# Altium PCB Sampler_DIOT.PCBDOC (part 7 of 10)
Units mm, origin at the board's own origin, x right, y up, seen from the top; angles counter-clockwise.
Board outline 222.9 x 100 mm, 4 copper layers (L1, P2, L3, L4), stack 1.6 mm thick; 697 components, 418 nets, 2175 pads, 1124 vias.
Unrouted connection lines stored in the file: 6.
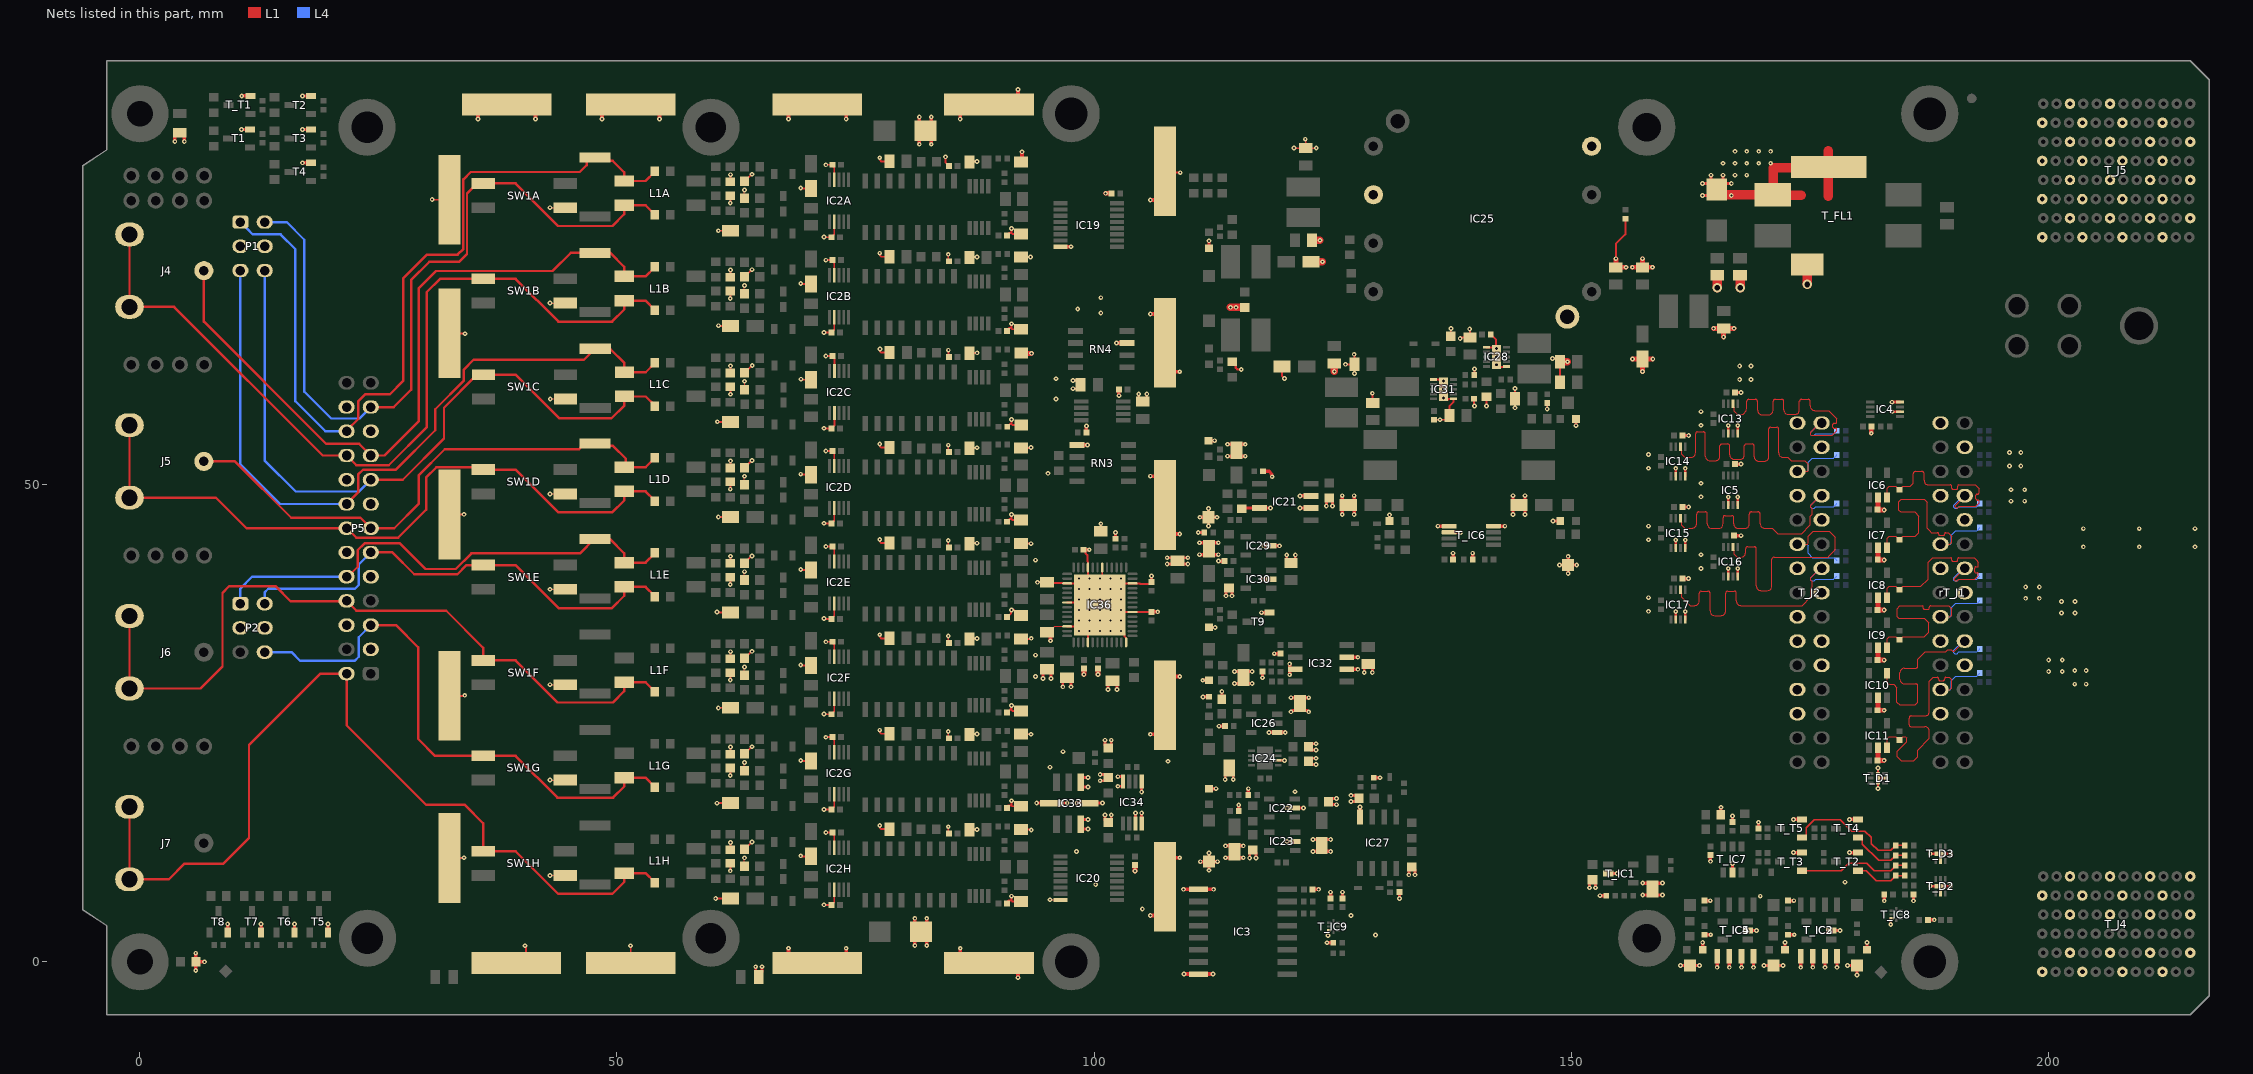
[diagram p7: the nets of this part, all layers, seen from the top]

## Via types
v1: diameter 0.5, hole 0.2, L1 to L4, tented both sides, 1103 vias
v2: diameter 1, hole 0.6, L1 to L4, tented both sides, 15 vias
v3: diameter 0.6, hole 0.3, L1 to L4, tented both sides, 6 vias

## Nets (pads, with @x,y where several pads share a name; then routed paths per layer and width w, separated by ;. In a path a pad name is that pad's centre, name@x,y a point inside that pad or via, vN(x,y) a via of type N, cw(c..) or ccw(c..) an arc to the next point about the centre after c; other vN are vias at no path point) (continued)
EEM_IO.LVDS_P2: IC6.3 R15.2 rT_J1.8 T_R37.2 | length 25.3
  L1 w0.127: IC6.3@183.127,48.67 183.127,49.637 183.333,49.844 184.062,49.844 184.407,49.5 R15.2@184.427,49.5 184.447,49.5 184.791,49.844 185.207,49.844 185.398,49.844 ccw(c185.398,50.323) 185.877,50.323 185.877,51.178 cw(c186.102,51.178) 186.102,51.403 186.779,51.403 cw(c186.779,51.178) 187.004,51.178 187.004,50.468 ccw(c187.483,50.468) 187.483,49.989 188.085,49.989 189.084,49.989 189.774,49.989 cw(c189.774,49.862) 189.901,49.862 189.901,49.653 ccw(c190.027,49.653) 190.027,49.528 190.403,49.528 ccw(c190.403,49.653) 190.528,49.653 190.528,49.862 cw(c190.655,49.862) 190.655,49.989 191.2,49.989 192.381,49.989 192.583,49.788 192.771,49.6 192.771,49.161 cw(c192.644,49.161) 192.644,49.034 192.573,49.034 ccw(c192.573,48.909) 192.447,48.909 192.447,48.533 ccw(c192.573,48.533) 192.573,48.407 192.644,48.407 cw(c192.644,48.28) 192.771,48.28 192.771,48.097 192.669,47.995 192.425,47.751 190.729,47.751 190.557,47.579 190.387,47.579 190.273,47.693 190.273,47.798 rT_J1.8@191.365,48.89
  L4 w0.127: rT_J1.8@191.27,48.86 191.12,48.86 190.142,47.882 190.142,47.627 190.217,47.553 190.495,47.553 190.666,47.724 192.532,47.724 192.61,47.802 192.63,47.802 192.856,48.028 T_R37.2@192.856,48.048
EEM_IO.LVDS_P3: IC7.3 R16.2 rT_J1.11 T_R38.2 | length 26.2
  L1 w0.127: IC7.3@183.127,43.42 183.127,44.387 183.333,44.594 184.062,44.594 184.407,44.25 R16.2@184.427,44.25 184.447,44.25 184.791,44.594 186.059,44.594 186.454,44.989 186.454,46.705 186.009,47.15 184.55,47.15 184.375,47.325 184.375,48.225 184.625,48.475 187.05,48.475 187.335,48.19 187.335,45.438 187.589,45.184 187.78,44.993 188.406,44.993 cw(c188.406,44.866) 188.533,44.866 188.533,44.818 ccw(c188.659,44.818) 188.659,44.693 189.035,44.693 ccw(c189.035,44.818) 189.16,44.818 189.16,44.866 cw(c189.287,44.866) 189.287,44.993 189.528,44.993 189.581,44.94 189.898,44.622 189.898,43.966 189.713,43.78 rT_J1.11@188.73,43.78
  L4 w0.127: rT_J1.11@188.73,43.78 189.728,43.78 189.848,43.9 189.848,44.727 190.305,45.184 192.532,45.184 192.609,45.262 192.629,45.262 192.856,45.488 T_R38.2@192.856,45.508
EEM_IO.LVDS_P4: IC8.3 R17.2 rT_J1.14 T_R39.2 | length 25.1
  L1 w0.127: IC8.3@183.127,38.17 183.127,39.137 183.333,39.344 184.062,39.344 184.407,39 R17.2@184.427,39 184.447,39 184.791,39.344 186.649,39.344 187.427,40.122 187.427,41.872 187.91,42.355 189.093,42.355 189.784,42.355 cw(c189.784,42.228) 189.911,42.228 189.911,42.115 ccw(c190.036,42.115) 190.036,41.99 190.412,41.99 ccw(c190.412,42.115) 190.538,42.115 190.538,42.228 cw(c190.665,42.228) 190.665,42.355 190.941,42.355 192.254,42.355 192.461,42.148 192.708,41.901 192.708,41.521 cw(c192.581,41.521) 192.581,41.394 192.436,41.394 ccw(c192.436,41.269) 192.311,41.269 192.311,40.893 ccw(c192.436,40.893) 192.436,40.767 192.581,40.767 cw(c192.581,40.64) 192.708,40.64 192.708,40.487 192.564,40.344 192.321,40.101 190.634,40.101 190.462,39.929 190.292,39.929 190.178,40.043 190.178,40.148 rT_J1.14@191.27,41.24
  L4 w0.127: rT_J1.14@191.27,41.24 191.12,41.24 190.142,40.262 190.142,40.007 190.217,39.933 190.495,39.933 190.666,40.104 192.532,40.104 192.61,40.182 192.63,40.182 192.856,40.408 T_R39.2@192.856,40.428
EEM_IO.LVDS_P5: IC9.3 R18.2 rT_J1.17 T_R40.2 | length 25
  L1 w0.127: IC9.3@183.127,32.92 183.127,33.887 183.333,34.094 184.062,34.094 184.407,33.75 184.447,33.75 184.791,34.094 187.021,34.094 187.479,34.552 187.479,35.564 187.043,36 184.336,36 184.174,36.162 184.174,37.029 184.447,37.301 186.115,37.301 186.805,37.301 cw(c186.805,37.174) 186.932,37.174 186.932,37.067 ccw(c187.058,37.067) 187.058,36.942 187.434,36.942 ccw(c187.434,37.067) 187.559,37.067 187.559,37.174 cw(c187.686,37.174) 187.686,37.301 188.178,37.301 189.599,37.301 189.898,37.002 189.898,36.346 189.713,36.16 rT_J1.17@188.73,36.16
  L4 w0.127: rT_J1.17@188.73,36.16 189.728,36.16 189.848,36.28 189.848,37.107 190.305,37.564 192.532,37.564 192.609,37.642 192.629,37.642 192.856,37.868 T_R40.2@192.856,37.888
EEM_IO.LVDS_P6: IC10.4 rT_J1.20 T_R41.2 | length 24.4
  L1 w0.127: IC10.4@183.127,30.27 183.127,29.322 183.379,29.07 183.805,29.07 184.154,28.721 184.154,27.225 184.445,26.934 186.06,26.934 186.351,27.225 186.351,28.725 186.351,28.916 ccw(c186.125,28.916) 186.125,29.141 184.952,29.141 cw(c184.952,29.62) 184.473,29.62 184.473,30.297 cw(c184.952,30.297) 184.952,30.776 186.125,30.776 ccw(c186.125,31.001) 186.351,31.001 186.351,31.591 186.351,31.711 187.149,32.51 189.282,32.51 189.463,32.691 189.872,32.691 190.022,32.541 190.191,32.541 rT_J1.20@191.27,33.62
  L4 w0.127: rT_J1.20@191.27,33.62 191.12,33.62 190.142,32.642 190.142,32.387 190.217,32.313 190.495,32.313 190.666,32.484 192.532,32.484 192.61,32.562 192.63,32.562 192.856,32.788 T_R41.2@192.856,32.808
EEM_IO.LVDS_P7: IC11.3 R19.2 rT_J1.23 T_R42.2 | length 30.9
  L1 w0.127: IC11.3@183.127,22.42 183.127,23.387 183.333,23.594 184.062,23.594 184.407,23.25 R19.2@184.427,23.25 184.447,23.25 184.79,23.593 185.038,23.593 185.17,23.461 ; 185.17,23.461 185.17,23.063 184.196,22.089 184.196,21.478 184.603,21.071 185.926,21.071 186.35,21.495 186.35,22.196 187.564,23.411 187.564,23.973 187.564,24.163 ccw(c187.085,24.163) 187.085,24.643 185.661,24.643 cw(c185.661,24.868) 185.435,24.868 185.435,25.544 cw(c185.661,25.544) 185.661,25.77 187.085,25.77 ccw(c187.085,26.249) 187.564,26.249 187.564,26.8 187.564,29.395 187.779,29.61 187.983,29.814 188.405,29.814 cw(c188.405,29.687) 188.532,29.687 188.532,29.606 ccw(c188.658,29.606) 188.658,29.481 189.034,29.481 ccw(c189.034,29.606) 189.159,29.606 189.159,29.687 cw(c189.286,29.687) 189.286,29.814 189.635,29.814 189.89,29.558 189.898,29.55 189.898,28.726 189.713,28.54 rT_J1.23@188.73,28.54
  L4 w0.127: rT_J1.23@188.73,28.54 189.728,28.54 189.848,28.66 189.848,29.487 190.305,29.944 192.532,29.944 192.609,30.022 192.629,30.022 192.856,30.248 T_R42.2@192.856,30.268
EEM_IO.LVDS_P8: IC13.6 T_J2.2 T_R43.2 | length 30.7
  L1 w0.127: IC13.6@166.978,58.494 166.978,58.219 167.101,58.096 167.101,57.724 167.442,57.383 167.929,57.383 168.035,57.383 168.209,57.557 ccw(c167.694,58.073) 168.423,58.073 168.423,58.735 cw(c168.648,58.735) 168.648,58.961 169.324,58.961 cw(c169.324,58.735) 169.55,58.735 169.55,57.821 ccw(c170.029,57.821) 170.029,57.341 170.705,57.341 ccw(c170.705,57.821) 171.185,57.821 171.185,58.735 cw(c171.41,58.735) 171.41,58.961 172.086,58.961 cw(c172.086,58.735) 172.312,58.735 172.312,57.85 ccw(c172.791,57.85) 172.791,57.37 173.467,57.37 ccw(c173.467,57.85) 173.947,57.85 173.947,58.735 cw(c174.172,58.735) 174.172,58.961 174.848,58.961 cw(c174.848,58.735) 175.074,58.735 175.074,58.264 ccw(c175.553,58.264) 175.553,57.785 176.152,57.785 176.997,57.785 177.694,57.088 177.856,56.926 177.856,56.572 cw(c177.729,56.572) 177.729,56.445 177.566,56.445 ccw(c177.566,56.339) 177.461,56.339 177.461,56.023 ccw(c177.566,56.023) 177.566,55.918 177.729,55.918 cw(c177.729,55.791) 177.856,55.791 177.856,55.669 177.416,55.229 177.359,55.173 175.217,55.173 175.142,55.247 175.142,55.502 176.12,56.48 T_J2.2@176.27,56.48
  L4 w0.127: T_J2.2@176.27,56.48 176.12,56.48 175.142,55.502 175.142,55.247 175.217,55.173 175.494,55.173 175.666,55.344 177.532,55.344 177.609,55.422 177.629,55.422 177.856,55.648 T_R43.2@177.856,55.668
EEM_IO.LVDS_P9: IC14.6 T_J2.5 T_R44.2 | length 38.6
  L1 w0.127: IC14.6@161.478,53.994 161.478,53.719 161.601,53.596 161.601,53.224 161.942,52.883 162.401,52.883 162.591,52.883 ccw(c162.591,53.342) 163.051,53.342 163.051,55.34 cw(c163.256,55.34) 163.256,55.546 163.872,55.546 cw(c163.872,55.34) 164.078,55.34 164.078,52.994 ccw(c164.537,52.994) 164.537,52.535 165.153,52.535 ccw(c165.153,52.994) 165.613,52.994 165.613,54.074 cw(c165.818,54.074) 165.818,54.279 166.434,54.279 cw(c166.434,54.074) 166.64,54.074 166.64,53.129 ccw(c167.099,53.129) 167.099,52.67 167.715,52.67 ccw(c167.715,53.129) 168.175,53.129 168.175,54.074 cw(c168.38,54.074) 168.38,54.279 168.996,54.279 cw(c168.996,54.074) 169.202,54.074 169.202,52.943 ccw(c169.661,52.943) 169.661,52.483 170.277,52.483 ccw(c170.277,52.943) 170.737,52.943 170.737,55.85 cw(c170.942,55.85) 170.942,56.056 171.558,56.056 cw(c171.558,55.85) 171.764,55.85 171.764,53.342 ccw(c172.223,53.342) 172.223,52.883 172.718,52.883 173.085,52.515 173.548,52.515 174.522,52.515 174.873,52.165 174.873,51.474 174.798,51.4 T_J2.5@173.73,51.4
  L4 w0.127: T_J2.5@173.73,51.4 174.728,51.4 174.847,51.519 174.847,52.347 175.304,52.804 177.532,52.804 177.609,52.882 177.629,52.882 177.856,53.108 T_R44.2@177.856,53.128
EEM_IO.LVDS_P10: IC15.6 T_J2.8 T_R45.2 | length 31.3
  L1 w0.127: IC15.6@161.477,46.494 161.477,46.219 161.6,46.096 161.6,45.767 161.911,45.457 162.5,45.457 162.691,45.457 ccw(c162.691,45.936) 163.17,45.936 163.17,46.938 cw(c163.395,46.938) 163.395,47.164 164.072,47.164 cw(c164.072,46.938) 164.297,46.938 164.297,45.901 ccw(c164.776,45.901) 164.776,45.422 165.453,45.422 ccw(c165.453,45.901) 165.932,45.901 165.932,46.554 cw(c166.157,46.554) 166.157,46.78 166.834,46.78 cw(c166.834,46.554) 167.059,46.554 167.059,45.901 ccw(c167.538,45.901) 167.538,45.422 168.215,45.422 ccw(c168.215,45.901) 168.694,45.901 168.694,46.938 cw(c168.919,46.938) 168.919,47.164 169.596,47.164 cw(c169.596,46.938) 169.821,46.938 169.821,45.936 ccw(c170.3,45.936) 170.3,45.457 171.02,45.457 171.076,45.457 171.644,44.889 174.171,44.889 175.099,45.817 175.099,46.73 175.291,46.922 175.291,47.478 175.142,47.627 175.142,47.882 176.12,48.86 T_J2.8@176.27,48.86
  L4 w0.127: T_J2.8@176.27,48.86 176.12,48.86 175.142,47.882 175.142,47.627 175.217,47.553 175.494,47.553 175.666,47.724 177.532,47.724 177.609,47.802 177.629,47.802 177.856,48.028 T_R45.2@177.856,48.048
EEM_IO.LVDS_P11: IC16.6 T_J2.11 T_R46.2 | length 32.1
  L1 w0.127: IC16.6@166.978,43.495 166.978,43.22 167.101,43.097 167.101,42.724 167.412,42.414 167.624,42.414 167.815,42.414 ccw(c167.815,42.893) 168.294,42.893 168.294,43.289 cw(c168.519,43.289) 168.519,43.514 169.196,43.514 cw(c169.196,43.289) 169.421,43.289 169.421,39.397 ccw(c169.9,39.397) 169.9,38.918 170.577,38.918 ccw(c170.577,39.397) 171.056,39.397 171.056,42.188 cw(c171.281,42.188) 171.281,42.414 171.897,42.414 176.959,42.414 177.034,42.488 177.713,43.167 177.713,44.482 177.055,45.14 175.38,45.14 174.873,44.633 174.873,43.854 174.798,43.78 T_J2.11@173.73,43.78
  L4 w0.127: T_J2.11@173.73,43.78 174.728,43.78 174.847,43.66 174.847,42.832 175.304,42.375 177.532,42.375 177.609,42.298 177.629,42.298 T_R46.2@177.856,42.071 T_R46.2@177.856,42.051
EEM_IO.LVDS_P12: IC17.6 T_J2.14 T_R47.2 | length 30.5
  L1 w0.127: IC17.6@161.477,38.995 161.477,38.72 161.6,38.597 161.6,38.224 162.481,37.343 162.777,37.343 162.968,37.343 ccw(c162.968,37.823) 163.447,37.823 163.447,38.64 cw(c163.673,38.64) 163.673,38.866 164.349,38.866 cw(c164.349,38.64) 164.574,38.64 164.574,36.775 ccw(c165.054,36.775) 165.054,36.295 165.73,36.295 ccw(c165.73,36.775) 166.209,36.775 166.209,38.64 cw(c166.435,38.64) 166.435,38.866 167.111,38.866 cw(c167.111,38.64) 167.336,38.64 167.336,37.823 ccw(c167.816,37.823) 167.816,37.343 168.432,37.343 174.229,37.343 175.133,38.247 175.133,39.134 175.291,39.292 175.291,39.858 175.142,40.007 175.142,40.262 176.12,41.24 T_J2.14@176.27,41.24
  L4 w0.127: T_J2.14@176.27,41.24 176.12,41.24 175.142,40.262 175.142,40.007 175.217,39.933 175.494,39.933 175.666,40.104 177.532,40.104 177.609,40.182 177.629,40.182 177.856,40.408 T_R47.2@177.856,40.428
EEM_IO.LVDS_P13: T_J2.17
EEM_IO.LVDS_P14: T_J2.20
EEM_IO.LVDS_P15: T_J2.23
GA0: T_R13.1 T_R31.1 T_T2.1 | length 5.6
  L1 w0.152: T_T2.1@180.1,9.55 180.958,9.55 181.993,8.515 183.523,8.515 184.032,9.024 T_R31.1@184.032,9.034 184.032,9.044 T_R13.1@185.002,9.044
GA1: T_R14.1 T_R32.1 T_T3.1 | length 11.7
  L1 w0.152: T_T3.1@174.216,9.55 178.3,9.55 179.1,10.35 181.004,10.35 181.785,9.569 182.714,9.569 182.718,9.565 183.467,9.565 183.471,9.569 183.523,9.569 T_R32.1@184.032,10.078 184.032,10.098 T_R14.1@185.002,10.098
GA2: T_R16.1 T_R33.1 T_T4.1 | length 6.4
  L1 w0.152: T_T4.1@180.1,13.017 180.291,13.017 180.529,12.778 180.529,12.342 182.247,10.623 183.523,10.623 184.032,11.133 T_R33.1@184.032,11.153 T_R16.1@185.002,11.153
GA3: T_R18.1 T_R34.1 T_T5.1 | length 14
  L1 w0.152: T_T5.1@174.216,13.027 174.401,13.027 174.65,13.276 174.65,13.462 174.665,13.477 174.665,14.065 175.5,14.9 178.225,14.9 179.425,13.7 180.815,13.7 181.481,13.034 181.481,12.375 182.179,11.678 183.523,11.678 184.032,12.187 T_R34.1@184.032,12.207 T_R18.1@185.002,12.207
GND: C1A.1 C1B.1 C1C.1 C1D.1 C1E.1 C1F.1 C1G.1 C1H.1 C3A.1 C3B.1 C3C.1 C3D.1 C3E.1 C3F.1 C3G.1 C3H.1 C4A.1 C4B.1 C4C.1 C4D.1 C4E.1 C4F.1 C4G.1 C4H.1 C5A.1 C5B.1 C5C.1 C5D.1 C5E.1 C5F.1 C5G.1 C5H.1 C7A.2 C7B.2 C7C.2 C7D.2 C7E.2 C7F.2 C7G.2 C7H.2 C8A.2 C8B.2 C8C.2 C8D.2 C8E.2 C8F.2 C8G.2 C8H.2 C9A.1 C9B.1 C9C.1 C9D.1 C9E.1 C9F.1 C9G.1 C9H.1 C10A.1 C10B.1 C10C.1 C10D.1 C10E.1 C10F.1 C10G.1 C10H.1 C11A.1 C11B.1 C11C.1 C11D.1 C11E.1 C11F.1 C11G.1 C11H.1 C12A.1 C12B.1 C12C.1 C12D.1 C12E.1 C12F.1 C12G.1 C12H.1 C13A.1 C13B.1 C13C.1 C13D.1 C13E.1 C13F.1 C13G.1 C13H.1 C14A.1 C14B.1 C14C.1 C14D.1 C14E.1 C14F.1 C14G.1 C14H.1 C15.1 C16.1 C17.1 C18.1 C19.1 C20.1 C21.1 C22.1 C23.1 C24.1 C25.1 C26.1 C27.1 C28.1 C29.1 C30.1 C32.1 C33.1 C37.1 C38.2 C39.1 C41.1 C43.1 C44.2 C45.1 C47.2 C48.1 C49.1 C50.2 C51.1 C52.2 C53.1 C54.1 C55.1 C56.1 C57.1 C58.1 C59.1 C60.1 C61.1 C62.1 C63.1 C64.1 C65.1 C66.1 C67.2 C68.1 C69.1 C70.1 C71.1 C72.1 C73.1 C74.1 C76.1 C77.2 C78.1 C79.1 C80.2 C81.1 C83.1 C84.2 C85.1 C86.1 C87.1 C88.1 C89.1 C90.1 C91.1 C92.1 C93.1 C94.1 C95.1 C96.1 C97.1 C98.1 C99.1 C100.1 C101.1 C102.1 C103.1 C104.1 C105.1 C106.1 CLIP1.1 CLIP2.1 CLIP3.1 CLIP4.1 CLIP5.1 CLIP6.1 CLIP7.1 CLIP8.1 CLIP9.1 CLIP10.1 CLIP11.1 CLIP12.1 CLIP13.1 CLIP14.1 CLIP15.1 CLIP16.1 CLIP17.1 CLIP18.1 D5.2 D6.1 IC2A.2 IC2A.9 IC2B.2 IC2B.9 IC2C.2 IC2C.9 IC2D.2 IC2D.9 IC2E.2 IC2E.9 IC2F.2 IC2F.9 IC2G.2 IC2G.9 IC2H.2 IC2H.9 IC3.1 IC3.8 IC4.2 IC4.4 IC5.2 IC5.4 IC6.2 IC7.2 IC8.2 IC9.2 IC10.2 IC11.2 IC13.2 IC13.4 IC14.2 IC14.4 IC15.2 IC15.4 IC16.2 IC16.4 IC17.2 IC17.4 IC19.8 IC20.8 IC21.3 IC21.6 IC21.7 IC22.2 IC23.2 IC24.6 IC25.3 IC25.5 IC25.8 IC26.1 IC27.4 IC28.1 IC28.6 IC28.11 IC29.2 IC30.2 IC31.1 IC31.6 IC31.11 IC32.3 IC32.6 IC32.7 IC33.3 IC33.4 IC33.5 IC33.8 IC34.3 IC34.4 IC34.5 IC34.8 IC36.3 IC36.7 IC36.12 IC36.18 IC36.26 IC36.32 IC36.38 IC36.46 IC36.49 IC36.53 LD1.1 LD2.1 LD3.1 LD4.1 LD5.1 LD6.1 LD7.1 LD8.1 LD9.1 LD10.1 LD11.1 P1.3 P1.4 P2.3 P2.4 P5.3 P5.6 P5.9 P5.12 P5.15 P5.18 P5.21 P5.24 R4A.1 R4B.1 R4C.1 R4D.1 R4E.1 R4F.1 R4G.1 R4H.1 R11A.1 R11B.1 R11C.1 R11D.1 R11E.1 R11F.1 R11G.1 R11H.1 R35.1 R52.1 R55.1 R57.1 R62.1 R63.1 R68.1 R71.1 R74.1 R92.2 R94.2 RN3.1 RN4.7 rT_J1.1 rT_J1.4 rT_J1.7 rT_J1.10 rT_J1.13 rT_J1.16 rT_J1.19 rT_J1.22 rT_J1.25 SW1A.3 SW1B.3 SW1C.3 SW1D.3 SW1E.3 SW1F.3 SW1G.3 SW1H.3 T1.2 T2.2 T3.2 T4.2 T5.2 T6.2 T7.2 T8.2 T9.2 T_C1.1 T_C2.2 T_C3.1 T_C4.1 T_C5.1 T_C6.1 T_C8.1 T_C9.1 T_C10.1 T_C12.1 T_C13.2 T_C16.1 T_C20.1 T_C22.1 T_C23.1 T_C24.1 T_C25.1 T_D1.2 T_D1.7 T_D2.2 T_D2.7 T_D3.2 T_D3.7 T_D5.2 T_FL1.4 T_IC1.2 T_IC2.2 T_IC3.1 T_IC3.2 T_IC3.3 T_IC3.4 T_IC4.2 T_IC5.1 T_IC5.2 T_IC5.3 T_IC5.4 T_IC6.4 T_IC6.5 T_IC6.6 T_IC7.2 T_IC8.4 T_IC9.4 T_J2.1 T_J2.4 T_J2.7 T_J2.10 T_J2.13 T_J2.16 T_J2.19 T_J2.22 T_J2.25 T_J4.A2 T_J4.A4 T_J4.A6 T_J4.C1 T_J4.C5 T_J4.D2 T_J4.D4 T_J4.D6 T_J4.F1 T_J4.F5 T_J4.G2 T_J4.G4 T_J4.G6 T_J4.I1 T_J4.I5 T_J4.J2 T_J4.J4 T_J4.J6 T_J4.L1 T_J4.L5 T_J5.A2 T_J5.A4 T_J5.A6 T_J5.C1 T_J5.C3 T_J5.C5 T_J5.C7 T_J5.D2 T_J5.D4 T_J5.D6 T_J5.F1 T_J5.F3 T_J5.F5 T_J5.F7 T_J5.G2 T_J5.G4 T_J5.G6 T_J5.G8 T_J5.I1 T_J5.I3 T_J5.I5 T_J5.I7 T_J5.J2 T_J5.J4 T_J5.J6 T_J5.J8 T_J5.L1 T_J5.L3 T_J5.L5 T_J5.L7 T_R6.1 T_R7.1 T_R9.1 T_R19.1 T_R25.1 T_R26.2 T_R27.2 T_T1.2 T_T2.2 T_T3.2 T_T4.2 T_T5.2 TP3.1 TP4.1 TP5.1 TP6.1 TP14.1 TP16.1 | length 551.9
  L1 w0.127: v1(42.989,9.05) SW1H.3@44.586,9.05 ; v1(42.989,19.05) SW1G.3@44.586,19.05 ; v1(42.989,29.05) SW1F.3@44.586,29.05 ; v1(42.989,39.05) SW1E.3@44.586,39.05 ; v1(42.989,49.05) SW1D.3@44.586,49.05 ; v1(42.989,69.05) SW1B.3@44.586,69.05 ; v1(42.989,79.05) SW1A.3@44.586,79.05 ; v1(43.002,59.006) SW1C.3@44.599,59.006 ; C5H.1@63.362,10.02 v1(63.362,10.897) ; C5G.1@63.362,20.02 v1(63.362,20.897) ; C5F.1@63.362,30.02 v1(63.362,30.897) ; C5E.1@63.362,40.02 v1(63.362,40.897) ; C5D.1@63.362,50.02 v1(63.362,50.897) ; C5B.1@63.362,70.02 v1(63.362,70.897) ; C5A.1@63.362,80.02 v1(63.362,80.897) ; C5C.1@63.375,59.976 v1(63.375,60.853) ; C96.1@95.069,34.566 95.28,34.566 95.896,35.182 96.501,35.182 96.522,35.161 97.185,35.161 IC36.12@97.189,35.165 ; v1(95.397,6.508) 96.477,6.508 IC20.8@96.499,6.487
  L1 w0.203: v1(30.629,79.919) 30.668,79.88 CLIP1.1@32.444,79.88 ; CLIP2.1@32.444,10.88 33.944,10.88 v1(33.969,10.905) ; CLIP5.1@32.444,27.88 34.019,27.88 34.044,27.905 v1(34.044,27.93) ; CLIP6.1@32.444,46.88 33.969,46.88 33.994,46.905 v1(33.969,46.905) ; CLIP7.1@32.444,65.88 34.019,65.88 v1(34.069,65.83) ; v1@35.415,88.337 v1@35.423,88.345 ; v1(40.357,1.687) 40.444,1.6 CLIP13.1@40.444,-0.12 ; v1@41.465,88.345 v1@41.473,88.337 ; v1@48.415,88.337 v1@48.423,88.345 ; v1(51.406,1.687) 51.444,1.649 CLIP17.1@51.444,-0.12 ; v1@54.465,88.345 v1@54.473,88.337 ; v1(60.344,6.63) C11H.1@61.894,6.63 ; v1(60.469,36.655) 60.494,36.63 C11E.1@61.894,36.63 ; v1(60.494,16.63) C11G.1@61.894,16.63 ; v1(60.519,56.605) 60.538,56.586 C11C.1@61.907,56.586 ; v1(60.619,26.605) 60.644,26.63 C11F.1@61.894,26.63 ; v1(60.619,46.63) C11D.1@61.894,46.63 ; v1(60.619,76.63) C11A.1@61.894,76.63 ; v1(60.644,66.68) 60.694,66.63 C11B.1@61.894,66.63 ; v1(61.876,9.54) R11H.1@61.876,10.312 ; R4H.1@61.876,11.76 v1@61.876,12.52 ; v1(61.876,19.54) R11G.1@61.876,20.312 ; R4G.1@61.876,21.76 v1@61.876,22.52 ; v1(61.876,29.54) R11F.1@61.876,30.312 ; R4F.1@61.876,31.76 v1@61.876,32.52 ; v1(61.876,39.54) R11E.1@61.876,40.312 ; R4E.1@61.876,41.76 v1@61.876,42.52 ; v1(61.876,49.54) R11D.1@61.876,50.312 ; R4D.1@61.876,51.76 v1@61.876,52.52 ; v1(61.876,69.54) R11B.1@61.876,70.312 ; R4B.1@61.876,71.76 v1@61.876,72.52 ; v1(61.876,79.54) R11A.1@61.876,80.312 ; R4A.1@61.876,81.76 v1@61.876,82.52 ; v1(61.889,59.496) R11C.1@61.889,60.268 ; R4C.1@61.889,61.716 v1@61.889,62.476 ; C1H.1@63.362,11.798 v1@64.112,12.548 ; C1G.1@63.362,21.798 v1@64.112,22.548 ; C1F.1@63.362,31.798 v1@64.112,32.548 ; C1E.1@63.362,41.798 v1@64.112,42.548 ; C1D.1@63.362,51.798 v1@64.112,52.548 ; C1B.1@63.362,71.798 v1@64.112,72.548 ; C1A.1@63.362,81.798 v1@64.112,82.548 ; C1C.1@63.375,61.754 v1@64.125,62.504 ; v1@67.971,1.423 v1@67.979,1.415 ; v1@67.971,88.337 v1@67.979,88.345 ; v1(69.262,11.113) 69.317,11.058 C8H.2@70.329,11.058 ; v1(69.262,21.113) 69.317,21.058 C8G.2@70.329,21.058 ; v1(69.262,31.113) 69.317,31.058 C8F.2@70.329,31.058 ; v1(69.262,41.113) 69.317,41.058 C8E.2@70.329,41.058 ; v1(69.262,51.113) 69.317,51.058 C8D.2@70.329,51.058 ; v1(69.262,71.113) 69.317,71.058 C8B.2@70.329,71.058 ; v1(69.262,81.113) 69.317,81.058 C8A.2@70.329,81.058 ; v1(69.275,61.069) 69.33,61.014 C8C.2@70.341,61.014 ; v1(71.699,5.974) 71.724,5.948 C10H.1@72.465,5.948 72.775,6.258 IC2H.2@72.775,7.567 ; v1(71.699,15.974) 71.724,15.948 C10G.1@72.465,15.948 72.775,16.258 IC2G.2@72.775,17.567 ; v1(71.699,25.974) 71.724,25.948 C10F.1@72.465,25.948 72.775,26.258 IC2F.2@72.775,27.567 ; v1(71.699,35.974) 71.724,35.948 C10E.1@72.465,35.948 72.775,36.258 IC2E.2@72.775,37.567 ; v1(71.699,45.974) 71.724,45.948 C10D.1@72.465,45.948 72.775,46.258 IC2D.2@72.775,47.567 ; v1(71.699,65.974) 71.724,65.948 C10B.1@72.465,65.948 72.775,66.258 IC2B.2@72.775,67.567 ; v1(71.699,75.974) 71.724,75.948 C10A.1@72.465,75.948 72.775,76.258 IC2A.2@72.775,77.567 ; v1(71.711,55.93) 71.737,55.904 C10C.1@72.478,55.904 72.788,56.214 IC2C.2@72.788,57.523 ; v1(71.887,13.543) 71.894,13.55 C9H.1@72.575,13.55 ; v1(71.887,23.543) 71.894,23.55 C9G.1@72.575,23.55 ; v1(71.887,33.543) 71.894,33.55 C9F.1@72.575,33.55 ; v1(71.887,43.543) 71.894,43.55 C9E.1@72.575,43.55 ; v1(71.887,53.543) 71.894,53.55 C9D.1@72.575,53.55 ; v1(71.887,63.493) 71.894,63.5 C9C.1@72.575,63.5 ; v1(71.887,73.543) 71.894,73.55 C9B.1@72.575,73.55 ; v1(71.887,83.543) 71.894,83.55 C9A.1@72.575,83.55 ; C9H.1@72.565,13.448 72.775,13.238 IC2H.9@72.775,11.967 ; C9G.1@72.565,23.448 72.775,23.238 IC2G.9@72.775,21.967 ; C9F.1@72.565,33.448 72.775,33.238 IC2F.9@72.775,31.967 ; C9E.1@72.565,43.448 72.775,43.238 IC2E.9@72.775,41.967 ; C9D.1@72.565,53.448 72.775,53.238 IC2D.9@72.775,51.967 ; C9B.1@72.565,73.448 72.775,73.238 IC2B.9@72.775,71.967 ; C9A.1@72.565,83.448 72.775,83.238 IC2A.9@72.775,81.967 ; C9C.1@72.578,63.404 72.788,63.194 IC2C.9@72.788,61.923 ; v1@74.021,1.415 v1@74.029,1.423 ; v1@74.021,88.345 v1@74.029,88.337 ; v1(77.544,14.28) 77.544,14.055 77.694,13.905 C3H.1@78.569,13.905 ; v1(77.544,24.28) 77.544,24.055 77.694,23.905 C3G.1@78.569,23.905 ; v1(77.544,34.28) 77.544,34.055 77.694,33.905 C3F.1@78.569,33.905 ; v1(77.544,44.28) 77.544,44.055 77.694,43.905 C3E.1@78.569,43.905 ; v1(77.544,54.28) 77.544,54.055 77.694,53.905 C3D.1@78.569,53.905 ; v1(77.544,74.28) 77.544,74.055 77.694,73.905 C3B.1@78.569,73.905 ; v1(77.544,84.28) 77.544,84.055 77.694,83.905 C3A.1@78.569,83.905 ; v1(77.557,64.236) 77.557,64.011 77.707,63.861 C3C.1@78.582,63.861 ; v1(84.444,84.38) 84.444,83.78 C13A.1@84.794,83.43 ; v1(84.719,14.155) 84.719,13.505 C13H.1@84.794,13.43 ; v1(84.719,24.155) 84.719,23.505 C13G.1@84.794,23.43 ; v1(84.719,34.155) 84.719,33.505 C13F.1@84.794,33.43 ; v1(84.719,44.155) 84.719,43.505 C13E.1@84.794,43.43 ; v1(84.719,54.155) 84.719,53.505 C13D.1@84.794,53.43 ; v1(84.719,74.155) 84.719,73.505 C13B.1@84.794,73.43 ; v1(84.732,64.111) 84.732,63.461 C13C.1@84.807,63.386 ; v1@85.971,1.423 v1@85.979,1.415 ; v1@85.971,88.337 v1@85.979,88.345 ; C12H.1@86.944,13.83 86.994,13.88 v1(87.744,13.88) ; C12G.1@86.944,23.83 86.994,23.88 v1(87.744,23.88) ; C12F.1@86.944,33.83 86.994,33.88 v1(87.744,33.88) ; C12E.1@86.944,43.83 86.994,43.88 v1(87.744,43.88) ; C12D.1@86.944,53.83 86.994,53.88 v1(87.744,53.88) ; C12B.1@86.944,73.83 86.994,73.88 v1(87.744,73.88) ; C12A.1@86.944,83.83 86.994,83.88 v1(87.744,83.88) ; C12C.1@86.957,63.786 87.007,63.836 v1(87.757,63.836) ; C14H.1@90.894,6.13 90.969,6.205 90.969,6.33 91.045,6.406 91.353,6.406 ; C14G.1@90.894,16.13 90.994,16.23 90.994,16.38 91.327,16.38 91.353,16.406 ; C14F.1@90.894,26.13 91.262,26.498 91.353,26.406 ; C14D.1@90.894,46.13 91.119,46.355 91.119,46.405 91.12,46.406 91.353,46.406 ; C14B.1@90.894,66.13 91.094,66.33 91.094,66.43 91.329,66.43 91.353,66.406 ; C14A.1@90.894,76.13 91.069,76.305 91.069,76.38 91.095,76.406 91.353,76.406 ; C14C.1@90.907,56.086 91.183,56.362 91.366,56.362 ; v1@91.307,36.867 91.307,36.543 C14E.1@90.894,36.13 90.919,36.13 91.323,36.534 91.323,36.85 v1(91.353,36.88) 91.461,36.988 92.143,36.306 C4E.1@92.353,36.306 ; v1(91.353,6.88) 91.353,6.406 ; v1(91.353,16.88) 91.353,16.406 ; v1(91.353,26.88) 91.353,26.406 ; v1(91.353,46.88) 91.353,46.406 ; v1(91.353,66.88) 91.353,66.406 ; v1(91.353,76.88) 91.353,76.406 ; v1(91.366,56.836) 91.366,56.362 ; v1@92.021,-1.655 v1@92.029,-1.663 ; v1@92.021,91.415 v1@92.029,91.423 ; C4H.1@92.353,6.306 91.453,6.306 91.353,6.406 ; C7H.2@92.353,13.856 93.393,13.856 v1(93.419,13.83) ; C4G.1@92.353,16.306 91.453,16.306 91.353,16.406 ; C7G.2@92.353,23.856 93.393,23.856 v1(93.394,23.855) ; C4F.1@92.353,26.306 91.453,26.306 91.353,26.406 ; C7F.2@92.353,33.856 93.37,33.856 v1(93.419,33.905) ; C7E.2@92.353,43.856 93.368,43.856 v1(93.394,43.83) ; C4D.1@92.353,46.306 91.453,46.306 91.353,46.406 ; C7D.2@92.353,53.856 93.345,53.856 v1(93.394,53.905) ; C4B.1@92.353,66.306 91.453,66.306 91.353,66.406 ; C7B.2@92.353,73.856 93.32,73.856 v1(93.344,73.88) ; C4A.1@92.353,76.306 91.453,76.306 91.353,76.406 ; C7A.2@92.353,83.856 C7A.2@92.451,83.954 ; C4C.1@92.366,56.262 91.466,56.262 91.366,56.362 ; C7C.2@92.366,63.812 C7C.2@92.398,63.78 ; v1@93.412,63.812 v1(93.444,63.78) ; v1(94.069,39.78) 94.084,39.795 C97.1@95.069,39.795 95.14,39.725 96.717,39.725 96.776,39.665 98.364,39.665 IC36.53@99.364,38.665 ; IC36.12@97.189,35.165 98.364,35.165 IC36.53@99.364,36.165 ; IC36.7@97.189,37.665 IC36.53@100.364,37.665 ; C90.1@98.9,43.197 99.108,42.988 99.108,42.813 99.298,42.623 99.298,41.968 99.355,41.911 99.355,41.349 IC36.49@99.364,41.34 IC36.53@99.364,38.665 ; IC36.18@99.364,33.49 IC36.53@99.364,36.165 ; C98.1@100.715,45.121 v1(100.715,45.921) ; IC36.46@100.864,41.34 IC36.53@100.864,37.665 ; IC34.8@102.996,18.881 IC34.8@103.082,18.967 ; IC36.26@103.364,33.49 103.355,33.499 103.355,33.949 103.217,34.087 103.217,34.317 102.869,34.665 v1(102.814,34.665) v1(101.714,35.765) v1(100.614,36.865) IC36.53@100.614,37.415 ; IC34.4@104.994,14.505 IC34.4@104.995,14.506 ; v1@105.901,4.851 v1@105.909,4.859 ; v1@105.901,23.851 v1@105.909,23.859 ; v1@105.901,50.909 v1@105.909,50.901 ; v1@105.901,67.909 v1@105.909,67.901 ; v1@105.901,79.851 v1@105.909,79.859 ; C93.1@105.944,39.88 105.944,39.722 105.825,39.603 104.873,39.603 104.811,39.665 102.864,39.665 IC36.53@100.864,37.665 ; C92.1@106.194,36.505 106.034,36.665 IC36.32@104.039,36.665 101.364,36.665 IC36.53@100.614,37.415 ; CLIP12.1@106.769,48.555 CLIP12.1@107.444,47.88 ; CLIP11.1@107.444,82.88 107.609,82.715 v1(109.041,82.715) ; C94.1@108.662,41.94 C94.1@108.752,42.03 ; v1@108.979,10.901 v1@108.987,10.909 ; v1@108.979,29.901 v1@108.987,29.909 ; v1@108.979,44.859 v1@108.987,44.851 ; v1@108.979,61.859 v1@108.987,61.851 ; v1@109.367,7.597 v1@109.375,7.605 ; v1@109.435,-1.293 v1@109.443,-1.285 ; v1@112.467,-1.285 v1@112.475,-1.293 ; v1@112.535,7.605 v1@112.543,7.597 ; C60.1@119.7,62.4 119.7,61.425 v1(119.975,61.15) ; v1(120.969,85.305) 120.994,85.28 C48.1@122.194,85.28 ; v1(122.144,86.23) 122.194,86.18 C48.1@122.194,85.28 ; v1(123.294,85.305) 123.269,85.28 C48.1@122.194,85.28 ; v1(126.369,62.63) C58.1@127.294,62.63 ; v1(127.269,63.68) 127.294,63.655 C58.1@127.294,62.63 ; v1(127.294,61.68) C58.1@127.294,62.63 ; v1@127.877,16.22 v1@127.885,16.228 ; v1(129.175,59.6) 129.2,59.575 C79.1@129.2,58.6 ; IC31.6@135.591,61.02 136.141,61.02 136.641,60.52 v3(136.641,60.02) 136.641,59.445 137.141,58.945 137.216,59.02 IC31.1@137.691,59.02 137.691,58.695 137.241,58.245 C86.1@137.241,57.27 137.066,57.095 137.066,56.82 v1(136.266,56.82) C78.1@135.641,56.82 ; C66.1@137.391,65.57 137.391,66.37 v1(137.416,66.395) ; v1(138.378,65.34) 138.494,65.455 C74.1@139.409,65.455 139.409,66.309 v1(139.378,66.34) ; C85.1@139.841,59.02 139.841,58.32 v1(139.891,58.27) ; R74.1@139.861,61.52 139.861,62.115 v1(139.891,62.145) ; v1(141.141,58.27) R68.1@141.141,59.22 ; IC28.1@141.142,64.415 141.824,64.415 IC28.11@142.192,64.046 ; C73.1@141.591,65.77 142.125,65.236 142.125,64.35 v3(142.192,64.282) IC28.11@142.192,64.046 ; v3(142.192,62.59) 142.442,62.34 143.168,62.34 IC28.6@143.242,62.415 ; v3(142.192,63.415) IC28.11@142.192,64.046 ; v1(144.128,58.068) 144.148,58.088 144.148,60.071 v1(144.128,60.09) ; v1(147.5,57.95) 147.512,57.962 C69.1@147.512,58.594 ; v1(148.046,63.248) 148.506,63.248 C55.1@148.853,62.901 C56.1@148.853,60.742 ; C53.1@154.694,72.78 154.694,75.246 155.694,76.246 R57.1@155.694,77.91 ; IC36.53@99.364,36.165 IC36.53@100.614,37.415 ; IC36.53@99.364,38.665 IC36.53@100.364,37.665 ; IC36.53@100.364,37.665 IC36.53@100.614,37.415 ; IC36.53@100.614,37.415 IC36.53@100.864,37.665
  L1 w0.25: R94.2@114.5,62.89 114.541,62.89 114.866,62.565 114.866,62.276 115.052,62.09 115.423,62.09 v1(115.429,62.083) ; IC24.6@119.312,21.11 119.961,21.11 v1(119.963,21.108) ; v1@124.526,2.645 T_IC9.4@124.526,3.296 ; v1(182.177,18.174) T_D1.7@182.177,19.25 v1(182.177,20.326) ; T_D1.7@182.252,19.25 T_D1.2@182.937,19.25 ; v1(183.517,3.9) T_IC8.4@183.517,4.552 ; v1(187.654,7.933) T_D2.7@188.731,7.933 v1(189.807,7.933) ; v1(187.654,11.332) T_D3.7@188.731,11.332 v1(189.807,11.332) ; T_D2.2@188.731,7.173 T_D2.7@188.731,7.858 ; T_D3.2@188.731,10.572 T_D3.7@188.731,11.257
  L1 w0.3: T_R27.2@64.539,-1.071 v1(64.539,-0.518) ; T_R27.2@65.189,-1.071 v1(65.189,-0.518) ; v1(93.992,16.634) IC33.8@95.094,16.634 ; v1(94.644,29.707) C99.1@94.644,30.259 ; v1(95.494,29.707) C99.1@95.494,30.259 ; IC33.8@96.094,16.634 v1(97.196,16.634) ; v1(96.73,28.822) C91.1@96.73,29.374 ; v1(97.58,28.822) C91.1@97.58,29.374 ; v1(97.79,60.075) C106.1@98.342,60.075 ; v1(97.79,60.925) C106.1@98.342,60.925 ; v1(98.192,16.634) IC33.4@99.294,16.634 ; IC33.3@98.807,13.914 v1(99.359,13.914) ; IC33.3@98.807,14.916 v1(99.359,14.916) ; IC33.5@98.807,18.314 v1(99.359,18.314) ; IC33.5@98.807,19.316 v1(99.359,19.316) ; IC33.4@99.794,16.634 v1(100.896,16.634) ; v1(100.648,18.975) C102.1@101.2,18.975 ; v1(100.648,19.625) C102.1@101.2,19.625 ; C101.1@101.158,14.836 v1(101.158,15.389) ; C100.1@101.158,22.683 v1(101.158,23.235) ; v1(101.469,28.545) C95.1@101.469,29.097 ; C101.1@101.808,14.836 v1(101.808,15.389) ; C100.1@101.808,22.683 v1(101.808,23.235) ; v1(102.419,28.545) C95.1@102.419,29.097 ; v1(102.494,18.404) IC34.8@103.046,18.404 ; v1(102.494,19.406) IC34.8@103.046,19.406 ; IC34.3@104.344,14.506 v1(104.344,15.608) ; C103.1@104.686,58.97 v1(104.686,59.523) ; v1(104.994,17.803) IC34.5@104.994,18.905 ; IC34.4@104.995,14.506 v1(104.995,15.608) ; C103.1@105.536,58.97 v1(105.536,59.523) ; v1(107.667,41.705) C94.1@108.219,41.705 ; v1(107.667,42.355) C94.1@108.219,42.355 ; C94.1@109.285,41.705 v1(109.837,41.705) ; C94.1@109.285,42.355 v1(109.837,42.355) ; R63.1@113.4,27.783 v1(113.4,28.335) ; v1(113.75,19.115) C63.1@113.75,19.667 ; v1(113.825,38.365) C71.1@113.825,38.917 ; v1(114.475,38.365) C71.1@114.475,38.917 ; v1(114.6,19.115) C63.1@114.6,19.667 ; R52.1@115.493,47.469 115.592,47.568 IC21.3@117.334,47.568 ; v1(116.319,10.884) C41.1@116.319,11.436 ; v1(116.969,10.884) C41.1@116.969,11.436 ; C68.1@120.2,42.083 v1(120.2,42.635) ; C68.1@121.1,42.083 v1(121.1,42.635) ; C26.1@122.711,20.685 v1(123.263,20.685) ; C26.1@122.711,21.335 v1(123.263,21.335) ; C61.1@122.711,22.21 v1(123.263,22.21) ; C61.1@122.711,22.86 v1(123.263,22.86) ; v1(124.354,47.774) C37.1@124.354,48.326 ; C43.1@124.858,16.475 v1(125.41,16.475) ; C43.1@124.858,17.125 v1(125.41,17.125) ; v1(125.004,47.774) C37.1@125.004,48.326 ; v1(126.94,16.8) C65.1@127.492,16.8 ; v1(126.94,17.45) C65.1@127.492,17.45 ; v1(128.325,30.315) C81.1@128.325,30.867 ; v1(129.175,30.315) C81.1@129.175,30.867 ; v1(133,9.115) C72.1@133,9.667 ; v1(133.65,9.115) C72.1@133.65,9.667 ; v1(151.925,7.765) T_C1.1@151.925,8.317 ; v1(152.575,7.765) T_C1.1@152.575,8.317 ; IC17.2@160.977,35.895 v1(160.977,36.725) ; IC15.2@160.977,43.394 v1(160.977,44.225) ; IC14.2@160.978,50.894 v1(160.978,51.724) ; IC17.4@161.977,35.895 v1(161.977,36.725) ; IC15.4@161.977,43.394 v1(161.977,44.225) ; IC14.4@161.978,50.894 v1(161.978,51.724) ; IC16.2@166.478,40.395 v1(166.478,41.225) ; IC5.2@166.478,47.894 v1(166.478,48.725) ; IC13.2@166.478,55.394 v1(166.478,56.224) ; IC16.4@167.478,40.395 v1(167.478,41.225) ; IC5.4@167.478,47.894 v1(167.478,48.725) ; IC13.4@167.478,55.394 v1(167.478,56.224) ; v1(183.637,57.664) IC4.2@184.467,57.664 ; v1(183.637,58.664) IC4.4@184.467,58.664
  L1 w0.35: v1(3.652,85.995) T_R26.2@3.652,86.9 ; v1(4.652,85.995) T_R26.2@4.652,86.9 ; v1(5.85,-0.905) T_C12.1@5.85,0 ; v1(5.85,0.905) T_C12.1@5.85,0 ; v1(6.755,0) T_C12.1@5.85,0 ; T8.2@9.193,3.05 v1(9.193,3.955) ; v1(10.645,87.251) T1.2@11.55,87.251 ; v1(10.67,90.765) T_T1.2@11.575,90.765 ; T7.2@12.696,3.05 v1(12.696,3.955) ; T6.2@16.2,3.05 v1(16.2,3.955) ; v1(17.045,83.75) T4.2@17.95,83.75 ; v1(17.045,87.251) T3.2@17.95,87.251 ; v1(17.045,90.752) T2.2@17.95,90.752 ; T5.2@19.7,3.05 v1(19.7,3.955) ; v1(81.219,1.7) D6.1@81.219,2.605 ; D6.1@81.219,3.655 v1(81.219,4.56) ; v1(81.694,85.7) D5.2@81.694,86.605 ; D5.2@81.694,87.655 v1(81.694,88.56) ; v1(82.469,1.7) D6.1@82.469,2.605 ; D6.1@82.469,3.655 v1(82.469,4.56) ; v1(82.944,85.7) D5.2@82.944,86.605 ; D5.2@82.944,87.655 v1(82.944,88.56) ; IC19.8@96.499,74.95 v1(97.601,74.95) ; C90.1@98.9,43.197 v1(99.501,43.197) ; C105.1@99.2,55.5 v1(99.2,56.151) ; C89.1@102.258,44.347 v1(102.258,44.998) ; v1(102.606,59.344) C104.1@102.606,59.995 ; C92.1@106.034,36.682 v1(106.685,36.682) ; C93.1@106.034,39.796 v1(106.034,40.448) ; v1(110.929,45) R71.1@111.58,45 ; v1(111.07,42.675) C77.2@111.975,42.675 ; v1(111.07,43.925) C77.2@111.975,43.925 ; v1(111.095,46.6) TP16.1@112,46.6 ; v1(111.145,10.5) TP14.1@112.05,10.5 ; v1(111.399,29.513) LD6.1@112.05,29.513 ; v1(111.424,27.77) R92.2@112.075,27.77 ; v1(112,45.695) TP16.1@112,46.6 ; v1(112,47.505) TP16.1@112,46.6 ; LD3.1@112,54.625 v1(112.651,54.625) ; v1(112.05,9.595) TP14.1@112.05,10.5 ; v1(112.05,11.405) TP14.1@112.05,10.5 ; LD11.1@112.05,35.05 v1(112.701,35.05) ; LD1.1@112.05,74.815 v1(112.05,75.573) ; LD4.1@112.125,18.15 v1(112.776,18.15) ; C77.2@112.125,42.675 v1(113.03,42.675) ; C77.2@112.125,43.925 v1(113.03,43.925) ; v1(112.905,46.6) TP16.1@112,46.6 ; v1(112.955,10.5) TP14.1@112.05,10.5 ; v1(113.049,42) C76.1@113.7,42 ; v1(113.099,24.7) C64.1@113.75,24.7 ; v1(113.795,10.907) C44.2@114.7,10.907 ; v1(113.795,12.157) C44.2@114.7,12.157 ; v1(113.995,53) C38.2@114.9,53 ; v1(113.995,54.25) C38.2@114.9,54.25 ; v1(114.72,29.175) C84.2@115.625,29.175 ; v1(114.72,30.425) C84.2@115.625,30.425 ; C44.2@114.75,10.907 v1(115.655,10.907) ; C44.2@114.75,12.157 v1(115.655,12.157) ; C38.2@114.95,53 v1(115.855,53) ; C38.2@114.95,54.25 v1(115.855,54.25) ; C45.1@115.175,15.8 v1(115.175,16.451) ; C84.2@115.675,29.175 v1(116.58,29.175) ; C84.2@115.675,30.425 v1(116.58,30.425) ; R55.1@116.174,17.5 v1(116.174,18.151) ; v1(117.567,36.6) T9.2@118.45,36.6 ; IC21.3@117.584,47.568 v1(118.49,47.568) ; v1(117.66,29.773) R35.1@117.66,30.424 ; C39.1@117.7,51.425 118.351,51.425 118.65,51.127 118.65,50.871 v1(118.679,50.842) ; v1(117.745,40.1) IC30.2@118.65,40.1 ; v1(117.745,43.6) v1(119.455,43.6) ; v1(118.332,24.047) v1(120.042,24.047) ; v1(118.895,32.3) C83.1@119.546,32.3 ; v1(120.239,12.619) IC23.2@121.144,12.619 ; v1(120.239,16.119) v1(121.949,16.119) ; v1(120.512,30.087) IC32.3@120.512,30.634 ; IC32.3@120.512,30.684 v1(120.512,31.232) ; v1(120.647,26.206) 120.688,26.206 120.817,26.335 121.453,26.335 C62.1@121.553,26.435 ; v1(120.647,27.685) C62.1@121.553,27.685 ; v1(121.579,47.568) IC21.6@122.484,47.568 ; v1(121.579,48.838) IC21.7@122.484,48.838 ; C62.1@121.603,26.435 121.703,26.335 122.339,26.335 122.467,26.206 v1(122.508,26.206) ; C62.1@121.603,27.685 v1(122.508,27.685) ; C15.1@122.9,7.601 v1(123.551,7.601) ; v1(122.945,11.575) C47.2@123.85,11.575 ; v1(122.945,12.825) C47.2@123.85,12.825 ; C47.2@123.9,11.575 v1(124.805,11.575) ; C47.2@123.9,12.825 v1(124.805,12.825) ; v1(124.429,2) T_R6.1@125.08,2 ; T_C25.1@124.8,6.646 v1(124.8,7.298) ; v1(126.019,46.9) C80.2@126.019,47.805 ; C80.2@126.019,47.955 v1(126.019,48.86) ; T_C24.1@126.05,6.646 v1(126.05,7.298) ; IC32.6@126.746,30.659 v1(127.652,30.659) ; IC32.7@126.746,31.929 v1(127.652,31.929) ; v1(127.269,46.9) C80.2@127.269,47.805 ; C80.2@127.269,47.955 v1(127.269,48.86) ; R62.1@129.325,19.29 v1(129.976,19.29) ; LD5.1@130.975,46.2 v1(130.975,46.851) ; v1(132.025,6.649) C29.1@132.025,7.3 ; v1(136.04,45.667) T_IC6.5@137.225,45.667 ; T_IC6.6@137.225,45.017 137.227,45.015 138.42,45.015 v1(138.422,45.012) ; T_C8.1@137.638,42.184 v1(137.638,42.835) ; T_R25.1@139.69,42.184 v1(139.69,42.836) ; T_IC6.4@141.875,45.667 v1(143.06,45.667) ; v1(143.925,46.9) C67.2@143.925,47.805 ; C67.2@143.925,47.955 v1(143.925,48.86) ; v1(145.175,46.9) C67.2@145.175,47.805 ; C67.2@145.175,47.955 v1(145.175,48.86) ; v1(148.099,46.2) LD8.1@148.75,46.2 ; v1(148.795,41.6) TP3.1@149.7,41.6 ; v1(149.7,40.695) TP3.1@149.7,41.6 ; v1(149.7,42.505) TP3.1@149.7,41.6 ; v1(150.525,56.196) LD7.1@150.525,56.897 ; v1(150.605,41.6) TP3.1@149.7,41.6 ; v1(153.029,6.935) T_R7.1@153.68,6.935 ; T_IC1.2@153.925,9.25 v1(154.83,9.25) ; v1(157.52,7) T_C2.2@158.425,7 ; v1(157.52,8.25) T_C2.2@158.425,8.25 ; T_C2.2@158.675,7 v1(159.58,7) ; T_C2.2@158.675,8.25 v1(159.58,8.25) ; v1(161.47,-0.387) TP6.1@162.121,-0.387 ; C30.1@161.677,40.17 v1(162.329,40.17) ; C27.1@161.677,47.669 v1(162.329,47.669) ; C25.1@161.678,55.169 v1(162.329,55.169) ; TP6.1@162.809,-0.387 v1(163.461,-0.387) ; v1(163.795,80.325) T_D5.2@164.7,80.325 ; v1(163.795,81.575) T_D5.2@164.7,81.575 ; LD10.1@163.8,1.371 v1(163.8,2.022) ; T_C5.1@163.997,2.834 v1(164.648,2.834) ; T_C6.1@163.997,6.413 v1(164.598,6.413) v1@164.648,6.413 ; v1(164.61,10.535) T_C20.1@164.61,11.186 ; T_D5.2@164.675,81.55 v1(164.675,82.455) ; v1(165.323,-0.575) T_IC5.1@165.323,0.584 ; T_R9.1@165.71,15.55 v1(165.71,16.201) ; T_D5.2@165.9,80.325 v1(166.805,80.325) ; T_D5.2@165.9,81.575 v1(166.805,81.575) ; T_D5.2@165.925,81.55 v1(165.925,82.455) ; v1(166.593,-0.575) T_IC5.2@166.593,0.33 ; T_IC7.2@166.919,9.386 v1(166.919,10.291) ; T_C13.2@166.919,14.636 v1(166.919,15.287) ; C28.1@167.178,44.67 v1(167.829,44.67) ; C18.1@167.178,52.169 v1(167.829,52.169) ; C24.1@167.178,59.669 v1(167.829,59.669) ; v1(167.863,-0.575) T_IC5.3@167.863,0.33 ; T_IC4.2@168.528,3.284 v1(169.433,3.284) ; v1(169.133,-0.575) T_IC5.4@169.133,0.33 ; T_C16.1@169.658,13.977 v1(169.658,14.629) ; v1(170.226,-0.387) TP4.1@170.877,-0.387 ; TP4.1@171.565,-0.387 v1(172.217,-0.387) ; LD9.1@172.425,1.371 v1(172.425,2.022) ; T_C3.1@172.753,2.834 v1(173.404,2.834) ; T_C4.1@172.753,6.413 v1(173.354,6.413) v1@173.404,6.413 ; v1(173.311,11.45) T_T3.2@174.216,11.45 ; v1(173.311,14.927) T_T5.2@174.216,14.927 ; v1(174.078,-0.575) T_IC3.1@174.078,0.584 ; v1(175.348,-0.575) T_IC3.2@175.348,0.33 ; v1(176.618,-0.575) T_IC3.3@176.618,0.33 ; T_IC2.2@177.283,3.284 v1(178.189,3.284) ; v1(177.888,-0.575) T_IC3.4@177.888,0.33 ; v1(178.982,-0.387) TP5.1@179.633,-0.387 ; v1(179.195,11.45) T_T2.2@180.1,11.45 ; v1(179.195,14.927) T_T4.2@180.1,14.927 ; v1(179.977,-1.382) TP5.1@179.977,-0.731 ; LD2.1@181.025,1.371 v1(181.025,2.022) ; v1@182.83,6.392 T_C22.1@182.83,7.042 ; v1(185.9,6.391) T_C23.1@185.9,7.042 ; T_R19.1@187.42,4.4 v1(188.071,4.4)
  L1 w0.4: v1@35.419,88.345 CLIP18.1@35.419,89.849 ; v1@41.469,88.345 CLIP18.1@41.469,89.849 ; v1@48.419,88.345 CLIP8.1@48.419,89.849 ; v1@54.469,88.345 CLIP8.1@54.469,89.849 ; CLIP16.1@67.975,-0.089 v1@67.975,1.415 ; v1@67.975,88.345 CLIP9.1@67.975,89.849 ; CLIP16.1@74.025,-0.089 v1@74.025,1.415 ; v1@74.025,88.345 CLIP9.1@74.025,89.849 ; CLIP14.1@85.975,-0.089 v1@85.975,1.415 ; v1@85.975,88.345 CLIP10.1@85.975,89.849 ; v1@92.025,-1.655 CLIP14.1@92.025,-0.151 ; CLIP10.1@92.025,89.911 v1@92.025,91.415 ; C7A.2@92.451,83.954 v1(92.451,84.905) ; v1(95.444,33.655) C96.1@95.444,34.566 ; RN3.1@98.225,54.18 v1@99.325,54.18 ; v1@102.35,64.86 RN4.7@103.45,64.86 ; v1@105.909,4.855 CLIP15.1@107.413,4.855 ; v1@105.909,23.855 CLIP3.1@107.413,23.855 ; v1@105.909,50.905 CLIP12.1@107.413,50.905 ; v1@105.909,67.905 CLIP4.1@107.413,67.905 ; v1@105.909,79.855 CLIP11.1@107.413,79.855 ; CLIP15.1@107.475,10.905 v1@108.979,10.905 ; CLIP3.1@107.475,29.905 v1@108.979,29.905 ; CLIP12.1@107.475,44.855 v1@108.979,44.855 ; CLIP4.1@107.475,61.855 v1@108.979,61.855 ; v1@109.375,7.601 IC3.1@110.879,7.601 ; v1@109.443,-1.289 IC3.8@110.947,-1.289 ; IC3.8@110.963,-1.289 v1@112.467,-1.289 ; IC3.1@111.031,7.601 v1@112.535,7.601 ; IC27.4@127.881,15.192 v1@127.881,16.22
  L1 w0.508: C7C.2@92.398,63.78 v1(93.444,63.78) ; v1(98.933,30.12) C88.1@98.933,30.6 ; v1(100.43,30.12) 100.432,30.123 C87.1@100.432,30.6 ; v1(101.222,80.554) C32.1@101.702,80.554 ; v1(104.3,9.531) C33.1@104.3,10 ; v1(154.7,73.7) C53.1@154.7,72.8 v1(155.75,72.8) ; v1(156.425,72.8) C54.1@157.5,72.8 ; v1(156.45,63.2) C52.2@157.5,63.2 ; v1(157.5,61.875) C52.2@157.5,63.2 ; v1(157.5,73.7) C54.1@157.5,72.8 ; v1(158.55,72.8) C54.1@157.5,72.8 ; v1(158.575,63.2) C52.2@157.5,63.2 ; v1(164.95,66.4) C57.1@166,66.4 ; v1(166,65.5) C57.1@166,66.4 ; v1(167.075,66.4) C57.1@166,66.4 ; v1(181.475,55.4) C17.1@181.475,56.05 ; C23.1@182.127,21.12 182.177,21.17 IC11.2@182.177,22.42 ; C21.1@182.127,31.82 182.177,31.87 IC9.2@182.177,32.92 ; IC7.2@182.127,43.37 IC7.2@182.177,43.42 C16.1@182.177,42.17 ; C23.1@182.177,21.12 v1(182.827,21.12) ; IC10.2@182.177,27.67 182.177,26.37 v1(182.827,26.37) ; C21.1@182.177,31.62 v1(182.827,31.62) ; C20.1@182.177,36.87 v1(182.827,36.87) ; C20.1@182.177,36.92 IC8.2@182.177,38.17 ; C16.1@182.177,42.12 v1(182.827,42.12) ; C19.1@182.177,47.37 v1(182.827,47.37) ; C19.1@182.177,47.42 IC6.2@182.177,48.67
  L1 w0.762: v1(114.294,68.6) C51.1@115.819,68.6 ; C50.2@122.744,73.38 v1(123.944,73.38) ; C49.1@122.844,75.63 v1(123.694,75.63) ; v1(125.194,61.88) C59.1@125.194,62.73 ; C55.1@148.853,62.901 v1(149.62,62.901)
  L1 w1: T_D5.2@165.3,81.525 T_D5.2@165.85,80.975 ; v2(165.33,70.666) T_C10.1@165.33,71.95 ; T_D5.2@165.85,80.4 T_FL1.4@171.301,80.4 ; v2(167.73,70.65) T_C9.1@167.73,71.95 ; T_FL1.4@171.175,80.35 171.175,83.25 T_FL1.4@177.025,83.25 ; T_FL1.4@171.252,80.375 174.152,80.375 ; v2(174.775,71.005) T_FL1.4@174.775,73.05 ; T_FL1.4@176.964,83.336 176.964,85.023 ; 176.975,80.273 T_FL1.4@176.975,83.173
  other v1: 92.025,-1.663 109.435,-1.289 112.475,-1.289 67.975,1.423 74.025,1.423 85.975,1.423 124.526,2.745 129.5,2.8 105.901,4.855 126.95,4.85 105.068,5.525 182.831,6.392 169.832,6.882 109.367,7.601 112.543,7.601 100.175,8.1 178.725,8.35 108.987,10.905 98.162,11.562 61.891,12.512 64.162,12.548 127.881,16.228 121.075,17.825 95.4,20.4 107.75,21.025 96.755,22.026 61.891,22.512 64.162,22.548 105.901,23.855 202.802,29.104 204.001,29.104 93.866,29.907 108.987,29.905 200.067,30.424 201.494,30.424 202.802,30.531 204.001,30.531 200.067,31.623 201.494,31.623 93.866,32.139 61.891,32.512 64.162,32.548 98.414,34.665 99.514,34.665 100.614,34.665 101.714,34.665 98.414,35.765 99.514,35.765 100.614,35.765 102.814,35.765 201.398,36.574 202.825,36.574 158.122,36.741 98.414,36.865 99.514,36.865 101.714,36.865 102.814,36.865 201.398,37.773 202.825,37.773 98.414,37.965 99.514,37.965 100.614,37.965 101.714,37.965 102.814,37.965 197.66,38.099 199.087,38.099 158.122,38.168 98.414,39.065 99.514,39.065 100.614,39.065 101.714,39.065 102.814,39.065 197.66,39.298 199.087,39.298 98.414,40.165 99.514,40.165 100.614,40.165 101.714,40.165 102.814,40.165 163.622,41.241 93.869,42.1 61.891,42.512 64.162,42.548 163.622,42.668 203.7,43.5 209.56,43.5 215.419,43.5 158.122,44.24 108.987,44.855 203.7,45.4 209.56,45.4 215.419,45.4 158.122,45.667 196.124,48.282 197.551,48.282 163.622,48.74 196.124,49.481 197.551,49.481 163.622,50.167 105.901,50.905 95.185,51.204 158.122,51.74 195.952,51.964 197.151,51.964 61.891,52.512 64.162,52.548 158.122,53.167 195.952,53.391 197.151,53.391 99.317,54.184 163.623,56.24 163.623,57.667 96.025,59 167.675,61.03 168.875,61.03 96.029,61.12 108.987,61.855 61.903,62.468 167.675,62.457 168.875,62.457 64.175,62.504 102.358,64.864 105.901,67.905 100.714,68 98.298,68.43 114.894,68.6 100.714,69.616 61.891,72.512 64.162,72.548 105.901,79.855 167.175,82.455 168.425,82.455 61.891,82.512 64.162,82.548 165.925,83.705 167.175,83.705 168.425,83.705 169.675,83.705 170.925,83.705 167.175,84.955 168.425,84.955 169.675,84.955 170.925,84.955 35.419,88.337 41.469,88.337 48.419,88.337 54.469,88.337 67.975,88.337 74.025,88.337 85.975,88.337 92.025,91.423
  other v3: 136.641,59.095 136.641,60.87
IN_N0: L1A.2 P1.2 P5.23 R8A.1 SW1A.1 | length 83.1
  L1 w0.254: P5.23@24.2,58.15 26.6,58.15 28.419,59.969 28.419,71.463 30.316,73.36 33.44,73.36 34.276,74.196 34.276,80.535 35.331,81.59 39.366,81.59 43.826,77.13 49.517,77.13 50.76,78.373 L1A.2@50.76,79.304 52.998,79.304 53.964,78.338 R8A.1@53.964,78.288
  L4 w0.254: P1.2@13.07,77.54 15.377,77.54 17.225,75.692 17.225,59.775 20.05,56.95 23,56.95 P5.23@24.2,58.15
IN_N1: J4.2 L1B.2 P5.20 R8B.1 SW1B.1 | length 89.1
  L1 w0.254: J4.2@-1.1,68.65 J4.2@-1.1,76.25 ; J4.2@-0.5,68.65 3.577,68.65 19.157,53.07 P5.20@21.66,53.07 22.68,52.05 26.075,52.05 30.044,56.019 30.044,70.18 31.444,71.58 35.403,71.58 35.413,71.59 39.366,71.59 43.851,67.105 49.492,67.105 50.76,68.373 L1B.2@50.76,69.304 52.998,69.304 53.964,68.338 R8B.1@53.964,68.288
IN_N2: L1C.2 P1.6 P5.17 R8C.1 SW1C.1 | length 73
  L1 w0.254: P5.17@24.2,50.53 27.545,50.53 31.869,54.854 31.869,58.071 35.344,61.546 39.379,61.546 43.97,56.955 49.398,56.955 50.773,58.329 L1C.2@50.773,59.26 53.011,59.26 53.977,58.294 R8C.1@53.977,58.244
  L4 w0.254: P1.6@13.07,72.46 13.07,52.555 16.325,49.3 22.97,49.3 P5.17@24.2,50.53
IN_N3: J5.2 L1D.2 P5.14 R8D.1 SW1D.1 | length 72.7
  L1 w0.246: 31.185,51.83 33.703,51.83
  L1 w0.254: J5.2@-1.1,48.65 J5.2@-1.1,56.25 ; J5.2@-0.5,48.65 7.967,48.65 11.167,45.45 P5.14@21.66,45.45 21.671,45.45 22.663,44.458 27.072,44.458 29.992,47.378 29.992,50.765 31.057,51.83 31.185,51.83 ; 33.703,51.83 35.173,51.83 35.413,51.59 39.366,51.59 43.851,47.105 49.492,47.105 50.76,48.373 L1D.2@50.76,49.304 52.998,49.304 53.964,48.338 R8D.1@53.964,48.288
IN_N4: L1E.2 P2.2 P5.11 R8E.1 SW1E.1 | length 51.9
  L1 w0.254: P5.11@24.2,42.91 26.465,42.91 28.75,40.625 33.275,40.625 34.24,41.59 ; R8E.1@53.964,38.288 53.964,38.338 52.998,39.304 L1E.2@50.76,39.304 50.76,38.373 49.467,37.08 43.876,37.08 39.366,41.59 SW1E.1@35.986,41.59 ; 34.24,41.59 SW1E.1@35.986,41.59 ; 34.24,41.59 SW1E.1@35.986,41.59
  L4 w0.254: P2.2@13.07,37.54 13.07,38.72 13.45,39.1 22.525,39.1 22.925,39.5 22.925,41.635 P5.11@24.2,42.91
IN_N5: J6.2 L1F.2 P5.8 R8F.1 SW1F.1 | length 79.4
  L1 w0.254: J6.2@-1.1,36.25 J6.2@-1.1,28.65 6.352,28.65 8.65,30.948 8.65,38.675 9.35,39.375 14.213,39.375 15.788,37.8 21.63,37.8 P5.8@21.66,37.83 22.69,36.8 32.099,36.8 35.986,32.913 SW1F.1@35.986,31.59 39.366,31.59 43.776,27.18 49.567,27.18 50.76,28.373 L1F.2@50.76,29.304 52.998,29.304 53.964,28.338 R8F.1@53.964,28.288
IN_N6: L1G.2 P2.6 P5.5 R8G.1 SW1G.1 | length 59.5
  L1 w0.254: P5.5@23.7,35.29 26.835,35.29 29.17,32.955 29.17,23.355 30.935,21.59 39.366,21.59 43.751,17.205 49.592,17.205 50.76,18.373 L1G.2@50.76,19.304 52.998,19.304 53.964,18.338 R8G.1@53.964,18.288
  L4 w0.254: P2.6@13.07,32.46 15.89,32.46 16.8,31.55 22.5,31.55 22.925,31.975 22.925,34.015 P5.5@24.2,35.29
IN_N7: J7.2 L1H.2 P5.2 R8H.1 SW1H.1 | length 93
  L1 w0.254: J7.2@-1.1,8.65 J7.2@-1.1,16.25 ; J7.2@-0.5,8.65 3.025,8.65 4.675,10.3 8.75,10.3 11.425,12.975 11.425,22.725 18.91,30.21 P5.2@21.66,30.21 21.66,24.79 30,16.45 34.05,16.45 35.986,14.514 SW1H.1@35.986,11.59 39.366,11.59 43.826,7.13 49.517,7.13 50.76,8.373 L1H.2@50.76,9.304 52.998,9.304 53.964,8.338 R8H.1@53.964,8.288
IN_P0: L1A.1 P1.1 P5.22 R1A.1 R5A.2 | length 87.8
  L1 w0.254: P5.22@21.66,55.61 21.66,55.688 22.899,56.927 22.899,58.773 23.602,59.476 26.179,59.476 27.581,60.878 27.581,71.629 30.081,74.129 33.291,74.129 33.895,74.733 33.895,82.01 34.67,82.785 46.102,82.785 46.814,83.497 46.814,83.907 47.212,84.305 49.019,84.305 49.199,84.125 49.199,83.973 49.217,83.954 49.549,83.954 50.76,82.743 L1A.1@50.76,81.844 52.998,81.844 53.964,82.81 R1A.1@53.964,82.86
  L4 w0.254: P1.1@10.53,77.54 10.559,77.54 11.218,76.881 11.218,76.852 11.82,76.25 14.74,76.25 16.275,74.715 16.275,58.775 19.44,55.61 P5.22@21.66,55.61
IN_P1: J4.1 L1B.1 P5.19 R1B.1 R5B.2 | length 77.5
  L1 w0.254: J4.1@6.7,72.45 6.7,67.107 19.502,54.305 22.965,54.305 P5.19@24.2,53.07 25.63,53.07 29.2,56.64 29.2,70.575 31.034,72.409 43.258,72.409 45.154,74.305 47.544,74.305 47.619,74.23 R5B.2@47.694,74.305 49.302,74.305 50.76,72.847 L1B.1@50.76,71.844 52.998,71.844 53.964,72.81 R1B.1@53.964,72.86
IN_P2: L1C.1 P1.5 P5.16 R1C.1 R5C.2 | length 77.3
  L1 w0.254: P5.16@21.66,47.99 22.863,49.193 22.863,51.063 23.4,51.6 26.833,51.6 30.95,55.717 30.95,57.922 33.958,60.93 33.958,62.089 34.974,63.105 46.529,63.105 47.654,64.23 47.665,64.219 R5C.2@47.707,64.261 49.271,64.261 50.769,62.763 50.769,61.804 L1C.1@50.773,61.8 53.011,61.8 53.977,62.766 R1C.1@53.977,62.816
  L4 w0.254: P1.5@10.53,72.46 10.53,52.12 14.66,47.99 P5.16@21.66,47.99
IN_P3: J5.1 L1D.1 P5.13 R1D.1 R5D.2 | length 57.8
  L1 w0.254: J5.1@6.7,52.45 9.95,52.45 15.85,46.55 23.1,46.55 P5.13@24.2,45.45 26.653,45.45 29.2,47.997 29.2,50.986 31.944,53.73 46.022,53.73 46.171,53.879 46.171,53.907 46.569,54.305 R5D.2@47.694,54.305 47.913,54.086 49.576,54.086 50.919,52.743 50.919,52.003 L1D.1@50.76,51.844 52.998,51.844 53.964,52.81 R1D.1@53.964,52.86
IN_P4: L1E.1 P2.1 P5.10 R1E.1 R5E.2 | length 52.5
  L1 w0.254: P5.10@21.66,40.37 21.795,40.37 22.83,41.405 22.83,43.156 23.538,43.864 27.246,43.864 29.935,41.175 33.1,41.175 34.732,42.807 46.112,42.807 47.61,44.305 47.652,44.263 R5E.2@47.694,44.305 49.262,44.305 50.76,42.807 L1E.1@50.76,41.844 52.998,41.844 53.964,42.81 R1E.1@53.964,42.86
  L4 w0.254: P2.1@10.53,37.54 10.53,39.13 11.77,40.37 P5.10@21.66,40.37